# Altium PCB corePCB1nohighfreq.PcbDoc (part 1 of 3)
Units mil, origin at the board's own origin, x right, y up, seen from the top; angles counter-clockwise.
Board outline 3543.31 x 3543.31 mil, 4 copper layers (Top Layer, Layer 1, Layer 2, Bottom Layer), stack 23.756 mil thick; 90 components, 166 nets, 640 pads, 463 vias.
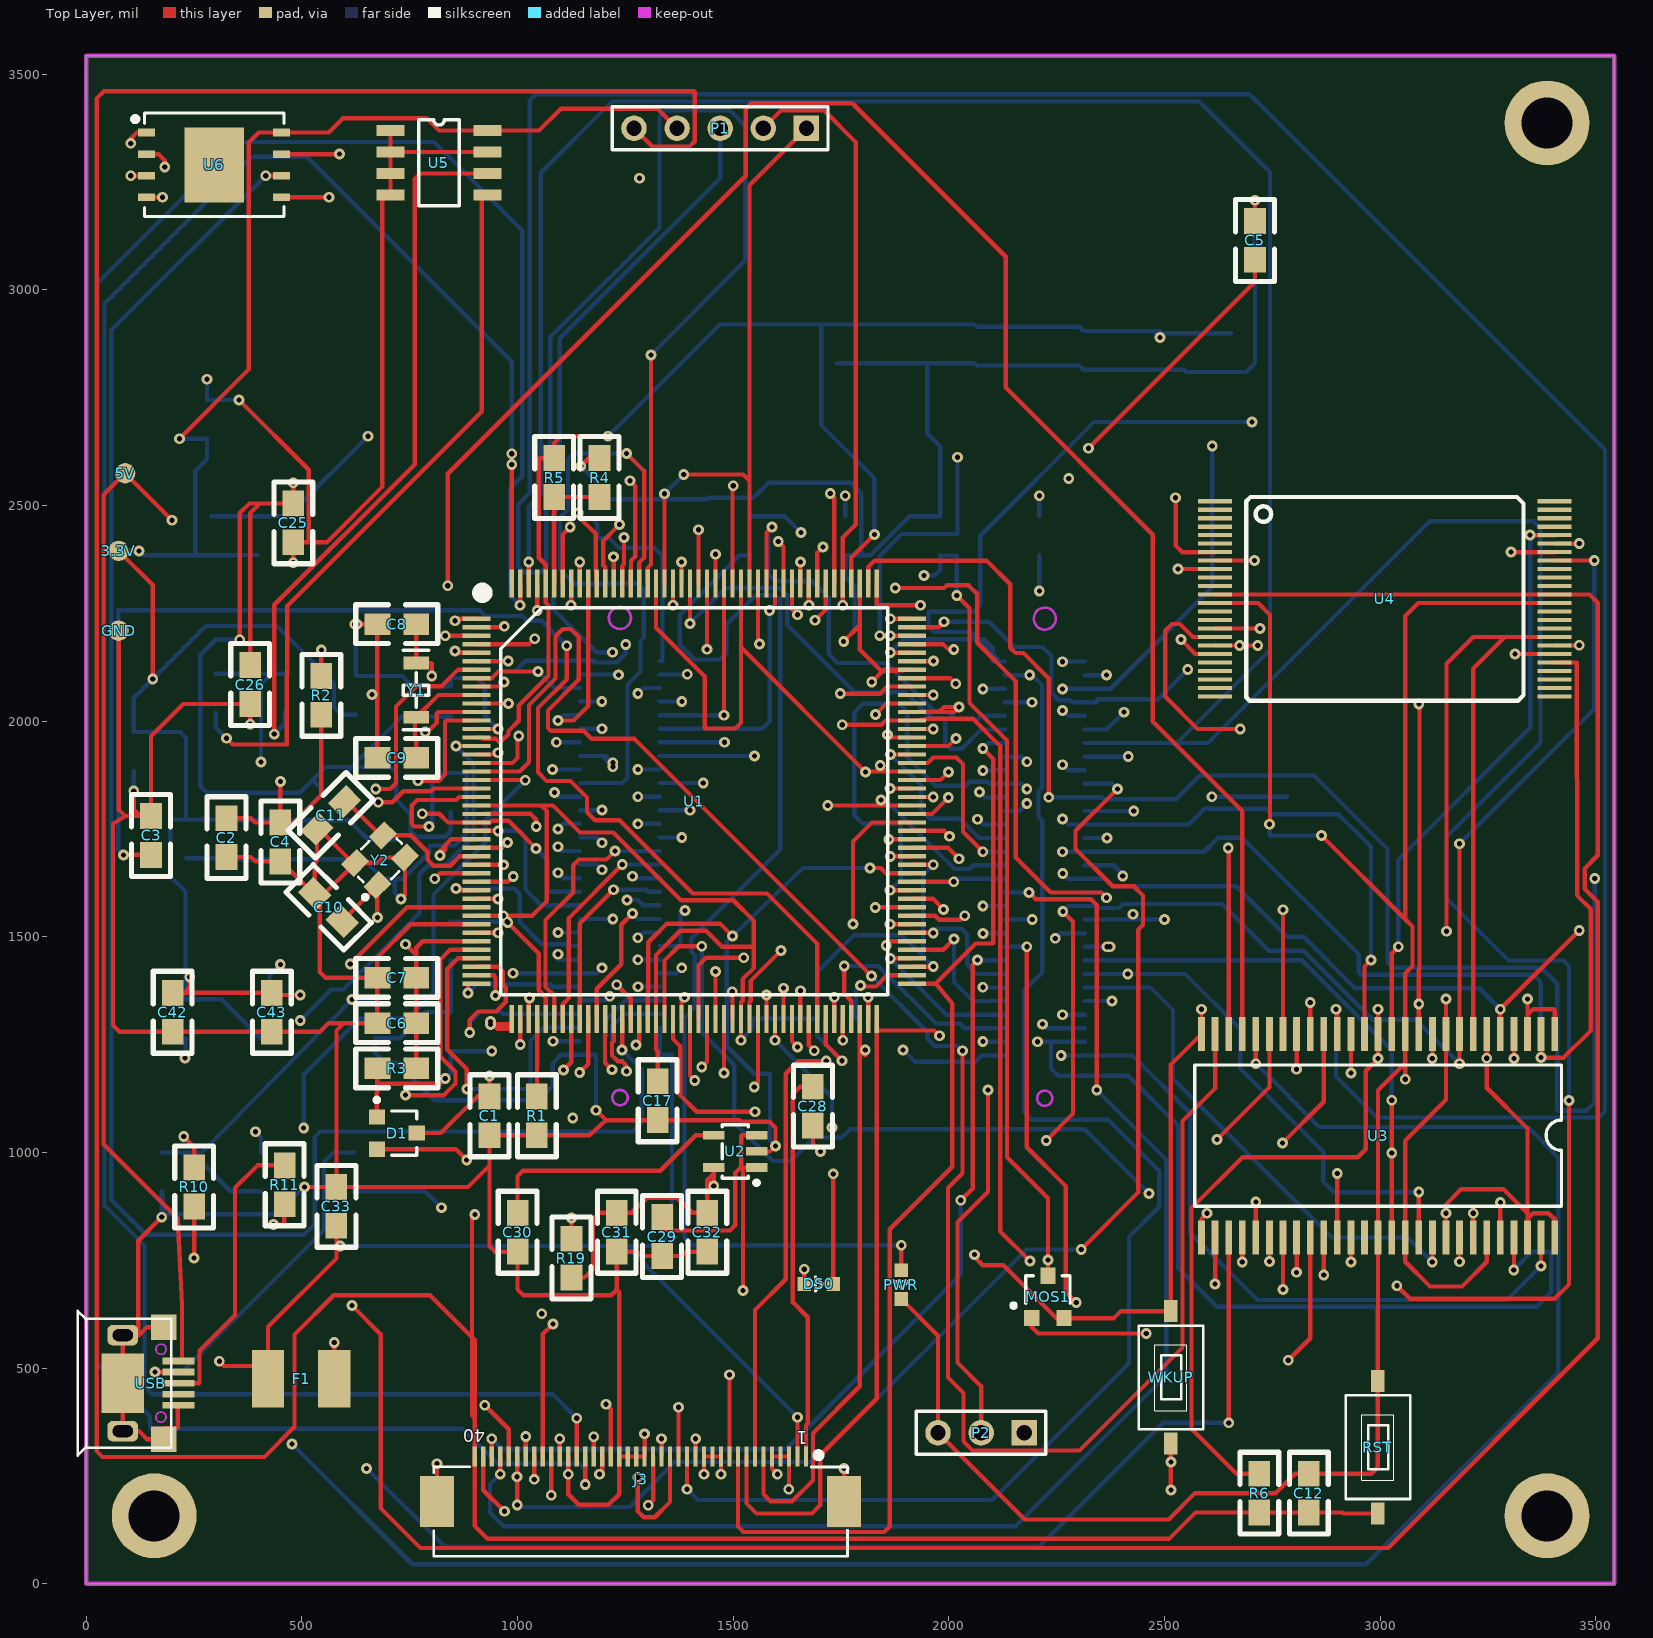
[diagram p0: Top Layer view]
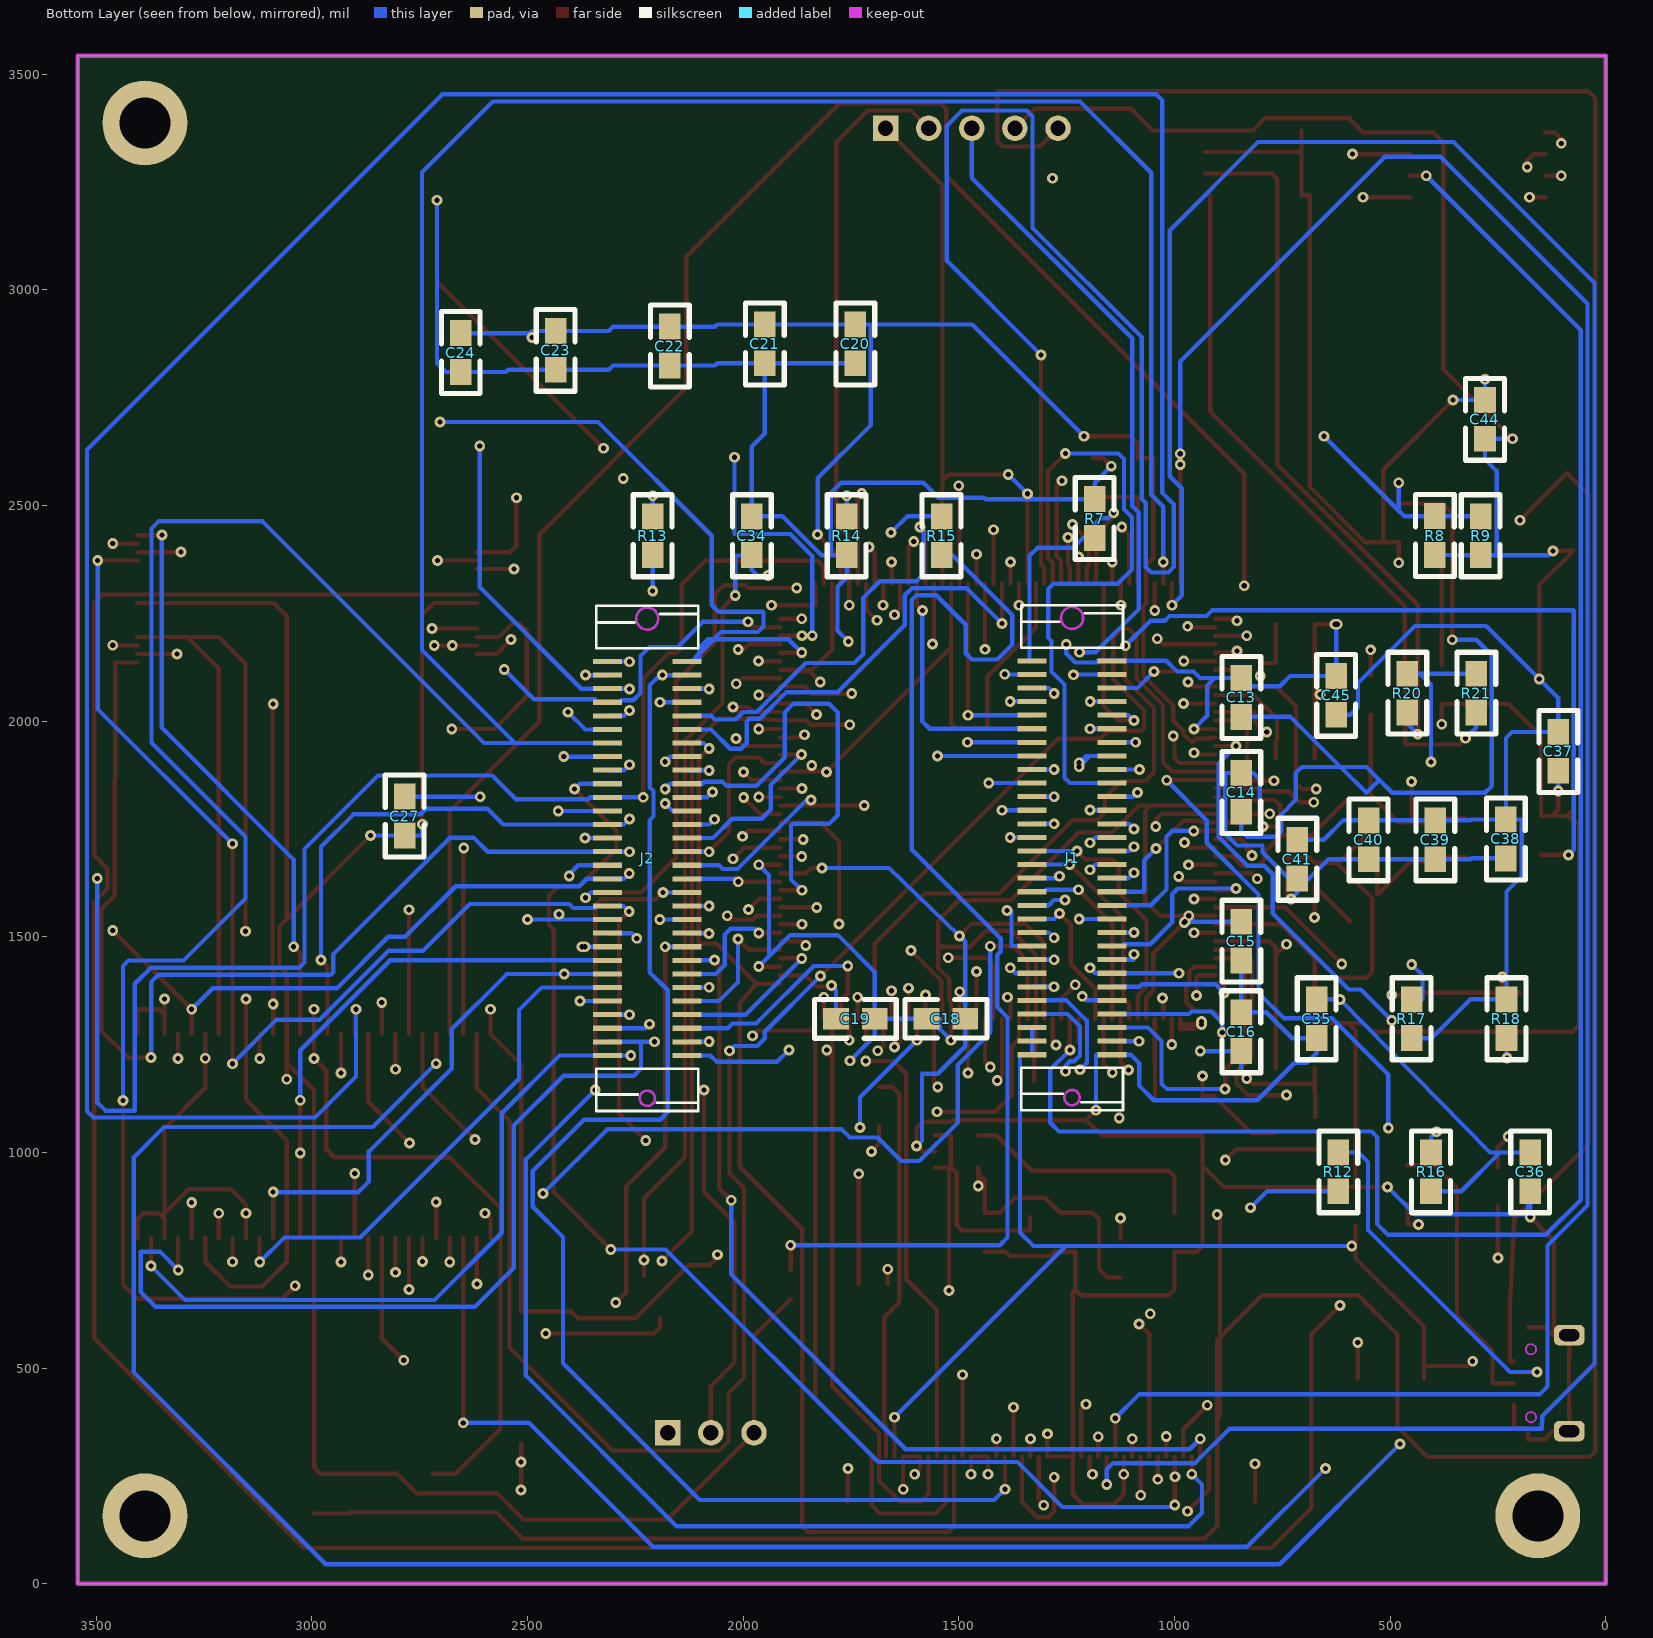
[diagram p1: Bottom Layer view, seen from below]
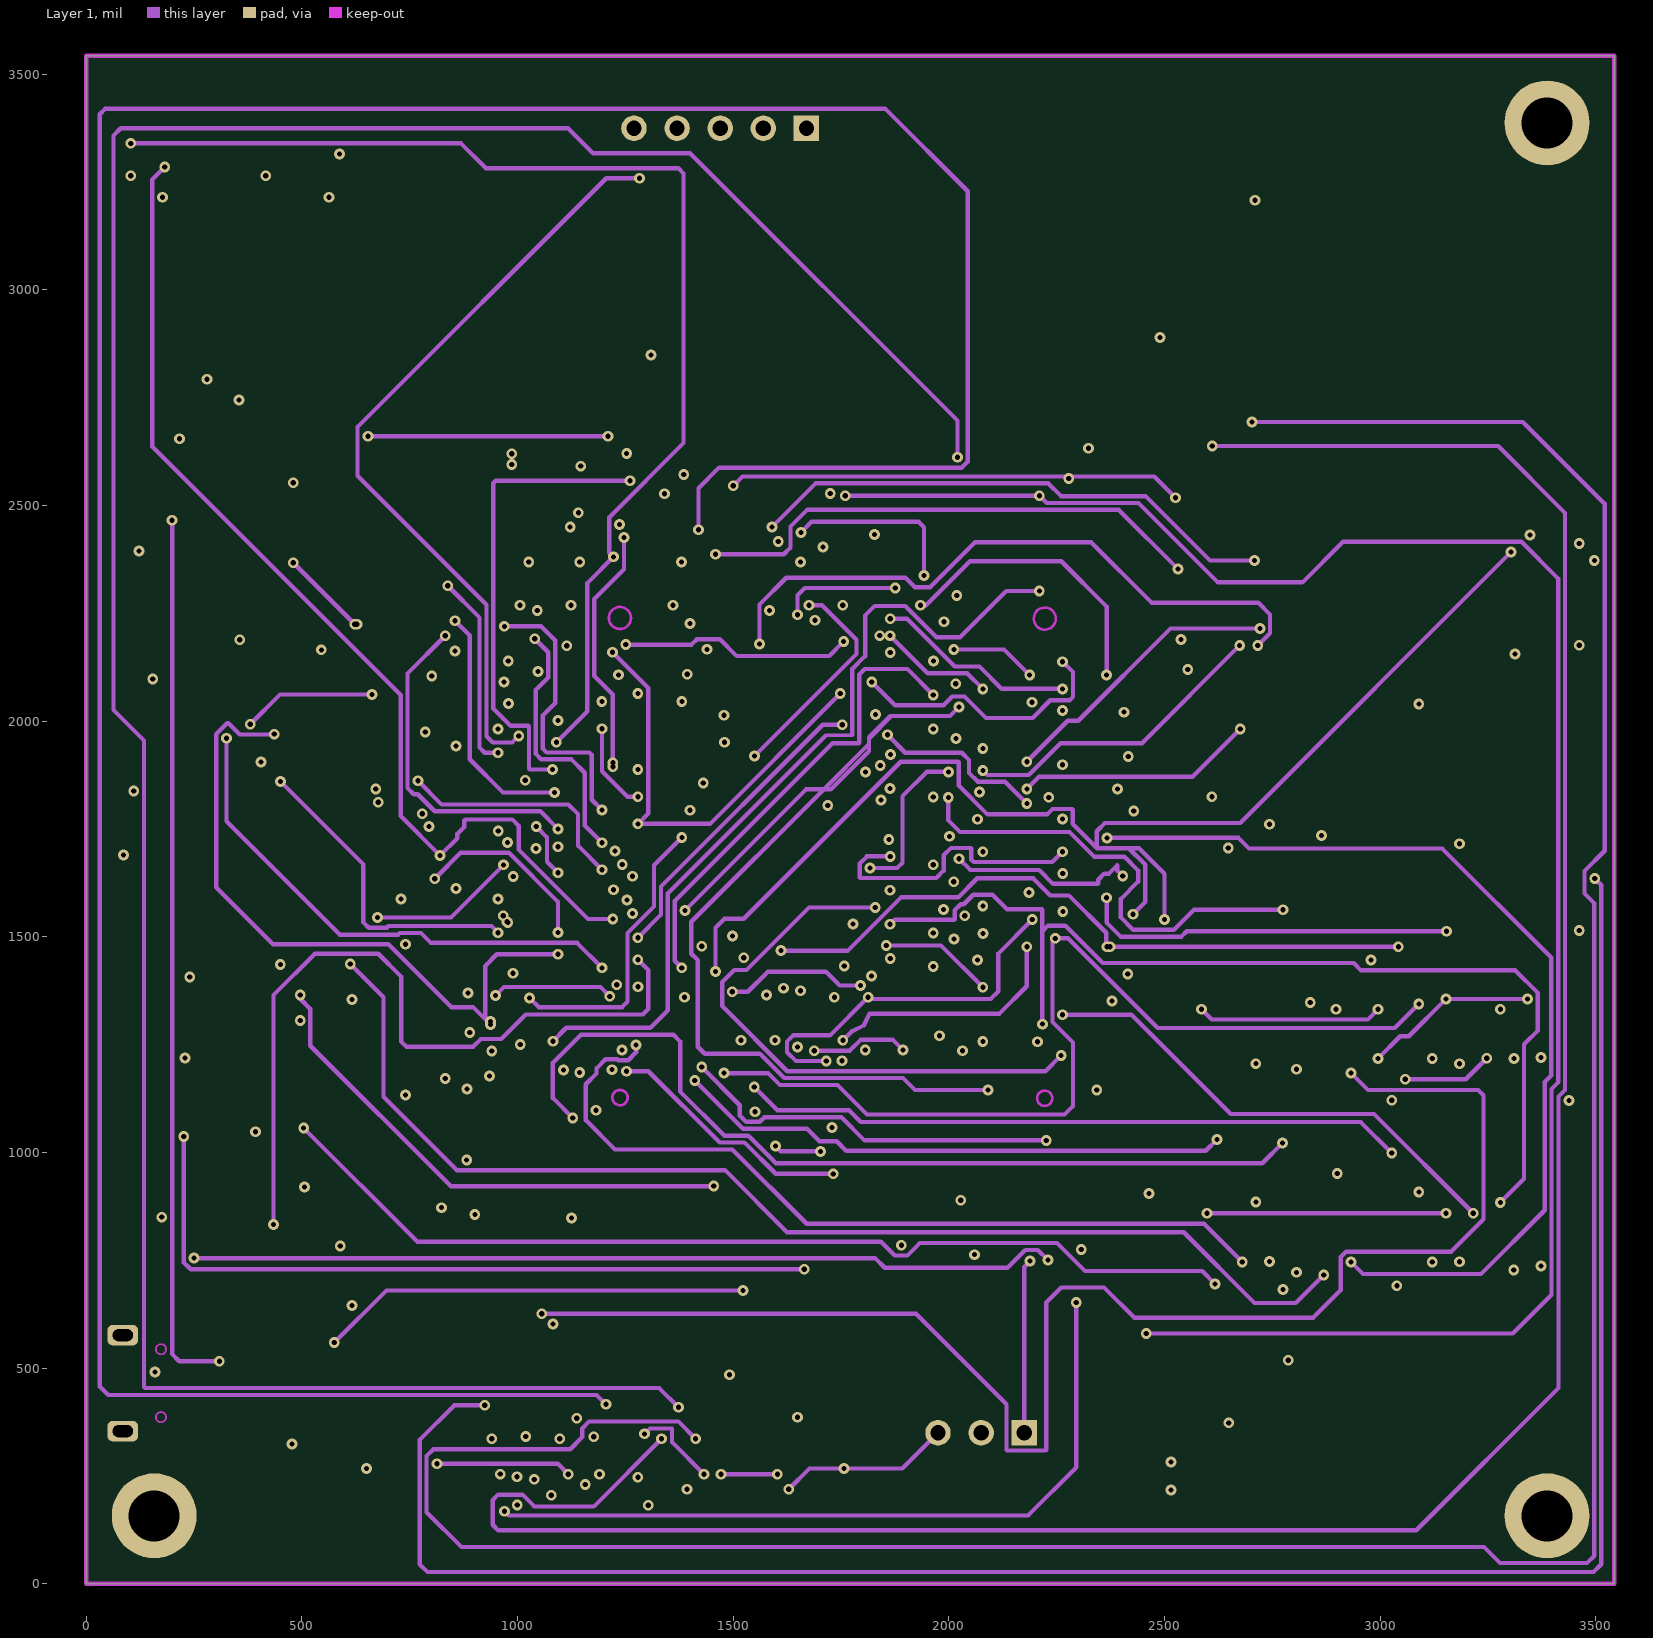
[diagram p2: Layer 1]
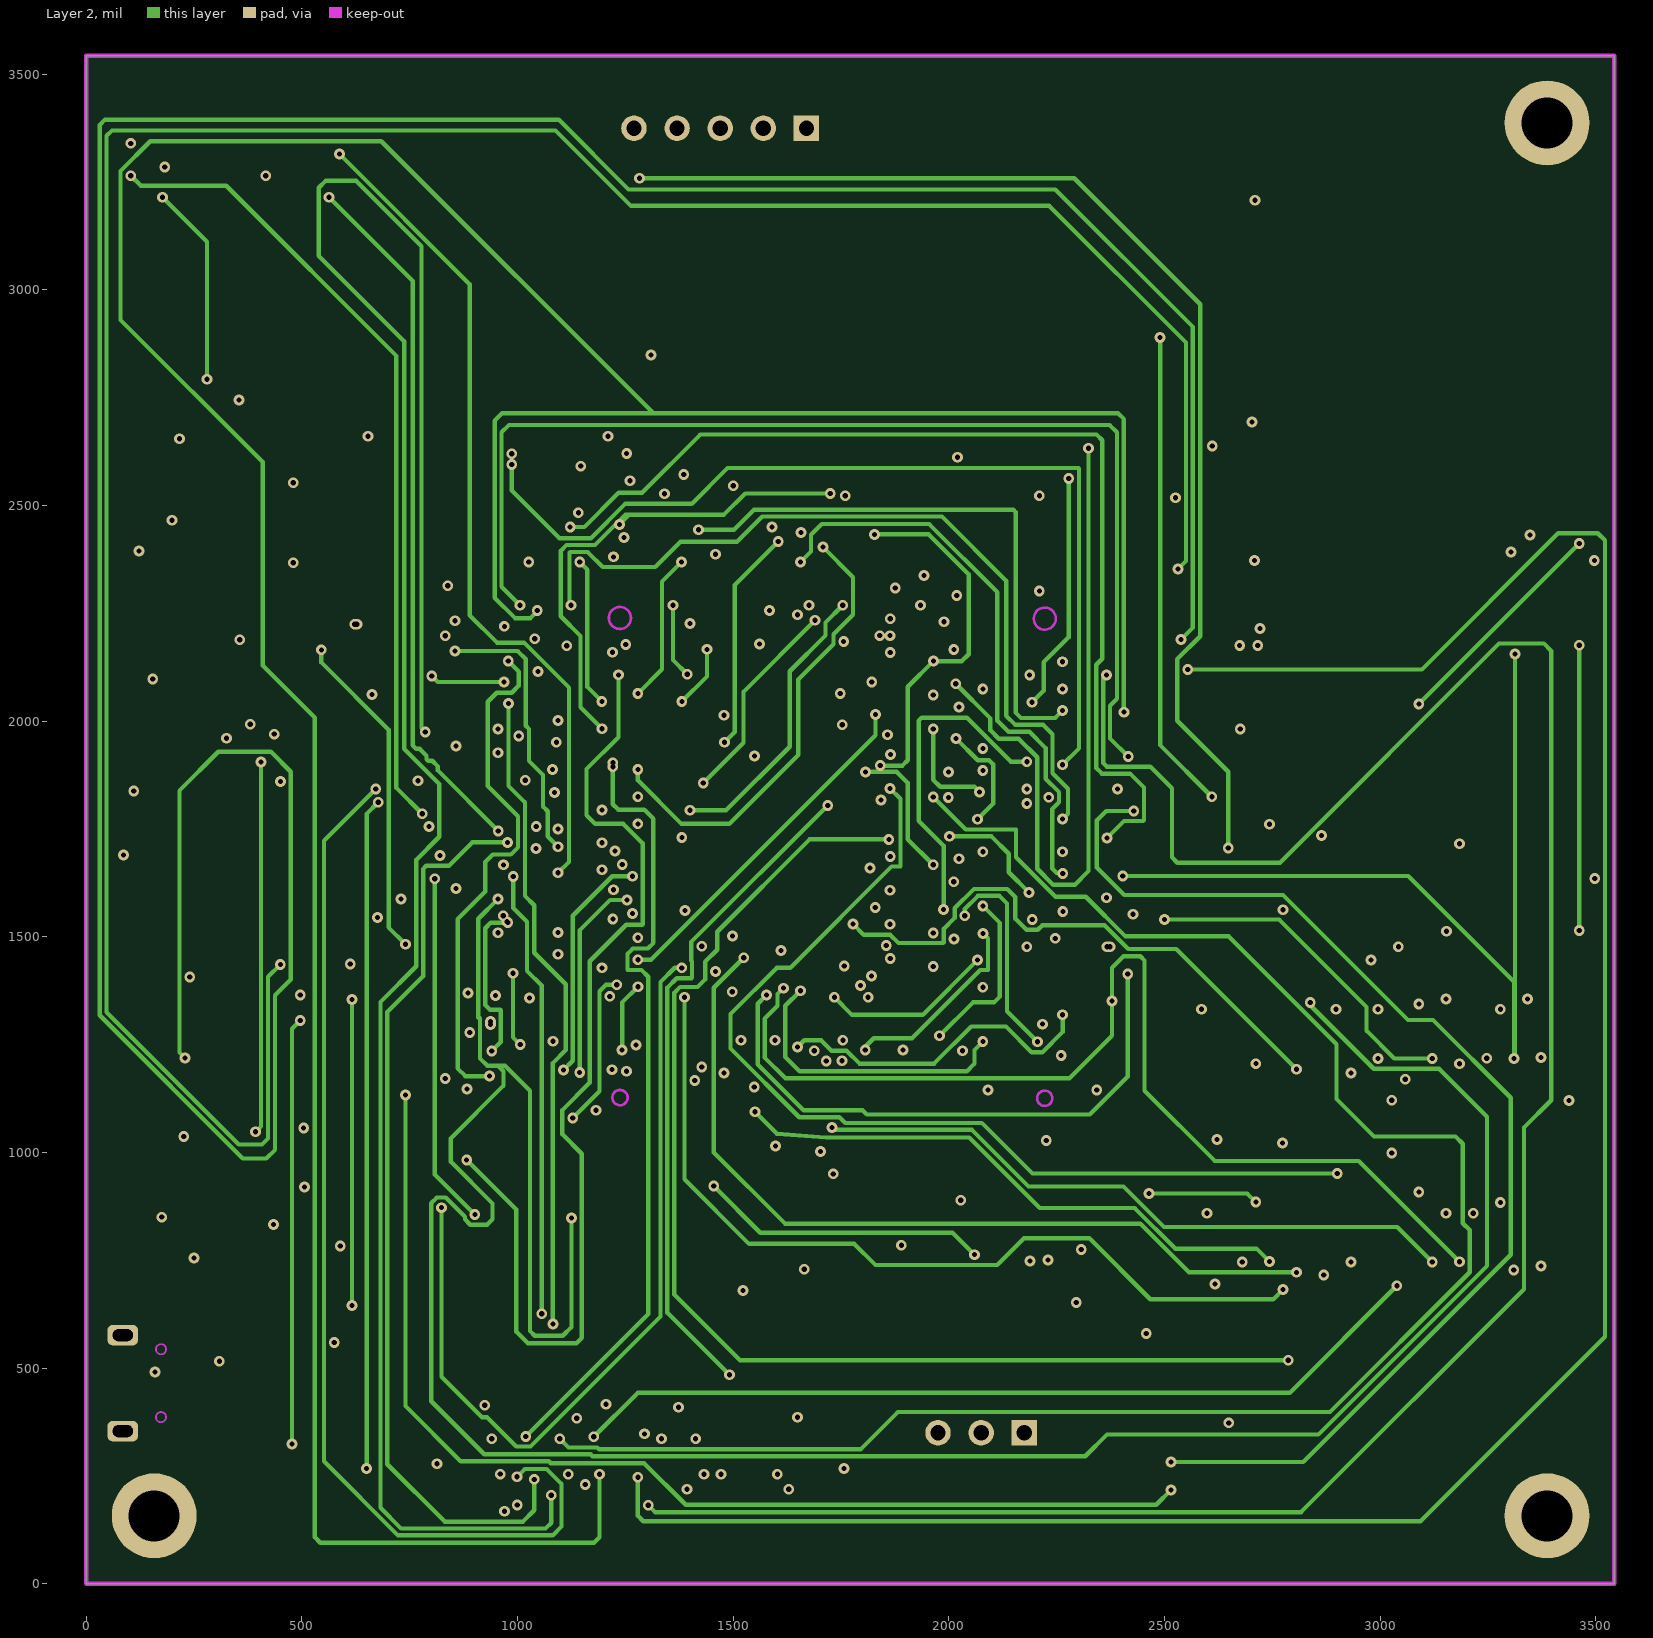
[diagram p3: Layer 2]

## Layer stack, top to bottom
Top Solder: solder mask 0.4, Solder Resist, Dk 3.5
Top Layer: signal copper 1.4
Dielectric1: prepreg 2.8, PP-006, Dk 4.1
Layer 1: signal copper 1.3779
Dielectric2: dielectric 12.6, FR-4, Dk 4.8
Layer 2: signal copper 1.3779
Dielectric3: prepreg 2.8, PP-006, Dk 4.1
Bottom Layer: signal copper 1.4
Bottom Solder: solder mask 0.4, Solder Resist, Dk 3.5

## Board outline
0,0 0,3543.31 3543.31,3543.31 3543.31,0

## Design rules (kind name [scope] priority, off if disabled: settings)
Clearance Clearance_GND [(InPolygon)] p1: gap=20 ignorepadtopadclearanceinfootprint=FALSE except(0: Arc-Hole Track-Hole SMDPad-Hole THPad-Hole Via-Hole Fill-Hole Poly-Hole Region-Hole Text-Hole)
Clearance [All] p2: gap=6 ignorepadtopadclearanceinfootprint=FALSE except(0: Arc-Hole Track-Hole SMDPad-Hole THPad-Hole Via-Hole Fill-Hole Poly-Hole Region-Hole Text-Hole)
ComponentClearance [All] p1: gap=0 collisioncheckmode=3 verticalgap=0 showdistances=FALSE
HoleSize [All] p1: absolutevalues=TRUE maxlimit=1000 minlimit=1 maxpercent=80.000 minpercent=20.000
HoleSize Testpoint [All] p2: absolutevalues=TRUE maxlimit=100 minlimit=1 maxpercent=80.000 minpercent=20.000
HoleSize TestPointUsage [All] p3: absolutevalues=TRUE maxlimit=100 minlimit=1 maxpercent=80.000 minpercent=20.000
MinimumSolderMaskSliver [All] p1: minsoldermaskwidth=0
PlaneConnect [All] p1: planeconnectstyle=Direct reliefexpansion=20 reliefentries=4 reliefconductorwidth=10 reliefairgap=10
PolygonConnect [All] p1: connectstyle=Direct reliefconductorwidth=10 reliefentries=4 polygonreliefangle="90 Angle" airgapwidth=10
RoutingVias [All] p1: holewidth=12 width=25 viastyle="Through Hole" minholewidth=8 minwidth=15 maxholewidth=50 maxwidth=50
SilkToSilkClearance [All] p1: silktosilkclearance=0
SilkToSolderMaskClearance SilkscreenOverComponentPads [IsPad] p1: minsilkscreentomaskgap=0 clearancetoexposedcopper=TRUE
SolderMaskExpansion [All] p1: expansion=4
Width [All] p1: maxlimit=100 minlimit=6 preferedwidth=10
24 further rules are at their usual default settings.

## Classes and differential pairs
component class circuit: 3.3V 5V C28 C29 C30 C31 C32 C33 C34 DS0 F1 GND J3 MOS1 P2 PWR R10 R11 R12 R13 R14 R15 U2 USB WKUP
component class mem: C35 C36 C37 C38 C39 C40 C41 C42 C43 C44 C45 R16 R17 R18 R19 R20 R21 U3 U4 U5 U6
component class stm: C1 C2 C3 C4 C5 C6 C7 C8 C9 C10 C11 C12 C13 C14 C15 C16 C17 C18 C19 C20 C21 C22 C23 C24 C25 C26 C27 D1 J1 J2 P1 R1 R2 R3 R4 R5 R6 R7 R8 R9 RST U1 Y1 Y2

## Components (designator, comment, footprint, x,y, rotation, side; value= is the part's Value field where it differs from the comment)
3.3V "TEST POINT" TP-1.5 75,2395 r90 top
5V "TEST POINT" TP-1.5 90,2575 r0 top
C1 "104" 0805 935,1130 r270 top
C2 "104" 0805 325,1685 r90 top
C3 "225" 0805 150,1690 r90 top
C4 "225" 0805 450,1675 r90 top
C5 "225" 0805 2710,3070 r90 top
C6 "10uF" 0805 675,1300 r0 top
C7 "104" 0805 675,1405 r0 top
C8 "6pF" 0805 675,2225 r0 top
C9 "6pF" 0805 675,1915 r0 top
C10 "22pF" 0805 530,1600 r315 top
C11 "22pF" 0805 535,1750 r45 top
C12 "104" 0805 2835,165 r90 top
C13 "104" 0805 845,2100 r270 bottom
C14 "104" 0805 845,1880 r270 bottom
C15 "104" 0805 845,1445 r90 bottom
C16 "104" 0805 845,1325 r270 bottom
C17 "104" 0805 1325,1075 r90 top
C18 "104" 0805 1485,1310 r0 bottom
C19 "104" 0805 1785,1310 r180 bottom
C20 "104" 0805 1740.06,2830 r90 bottom
C21 "104" 0805 1950,2830 r90 bottom
C22 "104" 0805 2170.06,2825 r90 bottom
C23 "104" 0805 2435,2815 r90 bottom
C24 "104" 0805 2655.06,2810 r90 bottom
C25 "104" 0805 479.94,2415 r90 top
C26 "104" 0805 380,2040 r90 top
C27 "104" 0805 2785.06,1735 r90 bottom
C28 "104" 0805 1684.94,1062.4 r90 top
C29 "10uF" 0805 1335,760 r90 top
C30 "103" 0805 1000,770 r90 top
C31 "104" 0805 1230,770 r90 top
C32 "10uF" 0805 1440,770 r90 top
C33 "104" 0805 580,830 r90 top
C34 "104" 0805 1980.13,2385 r90 bottom
C35 "104" 0805 670.13,1265 r90 bottom
C36 "104" 0805 175.13,910 r90 bottom
C37 "104" 0805 110.06,1885 r90 bottom
C38 "104" 0805 231.45,1681.93 r90 bottom
C39 "104" 0805 395,1680 r90 bottom
C40 "104" 0805 550,1680 r90 bottom
C41 "104" 0805 715,1635 r90 bottom
C42 "104" 0805 200,1280 r90 top
C43 "104" 0805 430,1280 r90 top
C44 "104" 0805 280,2655 r90 bottom
C45 "104" 0805 625,2015 r90 bottom
D1 "BAT54C" SOT-23 715,1045 r270 top
DS0 "LED" SMDLED-0603 1665,695 r0 top
F1 "1812L075PR" *1812 498.23,475 r0 top
GND "TEST POINT" TP-1.5 75,2210 r90 top
J1 "3710M060046G3FT01" 3710F060046G3FT01 1330,1226.61 r0 bottom
J2 "3710M060046G3FT01" 3710F060046G3FT01 2315.04,1225.04 r0 bottom
J3 "RGBLCD" FPC-TOP40 1668.7,299 r180 top
MOS1 "SI2301" SO-G3/C2.5 2230,665 r0 top
P1 "SWD" HDR1X5 1670,3375 r180 top
P2 "USART1" HDR1X3 2175,350 r180 top
PWR "LED" SMDLED-0603 1890,726.93 r270 top
R1 "10K" 0805 1045,1130 r270 top
R2 "10R" 0805 545,2015 r90 top
R3 "10R" 0805 765,1195 r180 top
R4 "0R" 0805 1190,2520 r90 top
R5 "0R" 0805 1085,2520 r90 top
R6 "10K" 0805 2720,165 r90 top
R7 "100K" 0805 1185,2425 r90 bottom
R8 "0R" 0805 396.13,2385.59 r90 bottom
R9 "0R" 0805 290,2385 r90 bottom
R10 "1K" 0805 249.94,875 r90 top
R11 "10R" 0805 460,880 r90 top
R12 "10R" 0805 620.06,910 r90 bottom
R13 "10R" 0805 2210.13,2385 r90 bottom
R14 "100K" 0805 1760.13,2385 r90 bottom
R15 "1K" 0805 1540.13,2385 r90 bottom
R16 "0R" 0805 405.13,910 r90 bottom
R17 "10K" 0805 450.13,1265 r90 bottom
R18 "10K" 0805 230.13,1265 r90 bottom
R19 "10K" 0805 1125,710 r90 top
R20 "4.7K" 0805 460,2020 r90 bottom
R21 "4.7K" 0805 300.13,2020 r90 bottom
RST "KEY_M" KEY_SOP3625 2995,162.91 r90 top
U1 "STM32F767IGT6" LQFP176 905.3,2237.78 r0 top locked
U2 "CAT6219-330TD" SOT-23-5 1555,965 r180 top
U3 "W9825G6KH" TSOP54 3404.96,1275 r270 top
U4 "MT29F4G08" TSOP48 2617.6,2510.27 r0 top
U5 "24C02" SOP-8 705.59,3370 r0 top
U6 "W25Q256" WSON8 296.5,3290 r0 top
USB "USB-AB" "USB_AB - 5S - B" 0,465 r90 top
WKUP "KEY_UP" KEY_SOP3625 2515,325 r90 top
Y1 "32.768KHz" XTAL3215 765,2135 r270 top
Y2 "25Mhz" XTAL3225 675,1620 r45 top

## Footprints (in the part's own frame and the unit in brackets; to place one, negate y for a bottom-side part, rotate by r counter-clockwise, add the part's x,y. Pads: shape width x height; smd on the part's side, far side on the other; paste and mask are expansions set on the pad)
0805 [mil]
  rect 60x50 smd: 1(0,-0.06) 2(90,-0.06)
  silkscreen extent -50,-45 140,45
3710F060046G3FT01 [mm]
  rect 1.7x0.3 smd: 1(-4.7,0) 2(-4.7,-0.8) 3(-4.7,-1.6) 4(-4.7,-2.4) 5(-4.7,-3.2) 6(-4.7,-4) 7(-4.7,-4.8) 8(-4.7,-5.6) 9(-4.7,-6.4) 10(-4.7,-7.2) 11(-4.7,-8) 12(-4.7,-8.8) 13(-4.7,-9.6) 14(-4.7,-10.4) 15(-4.7,-11.2) 16(-4.7,-12) 17(-4.7,-12.8) 18(-4.7,-13.6) 19(-4.7,-14.4) 20(-4.7,-15.2) 21(-4.7,-16) 22(-4.7,-16.8) 23(-4.7,-17.6) 24(-4.7,-18.4) 25(-4.7,-19.2) 26(-4.7,-20) 27(-4.7,-20.8) 28(-4.7,-21.6) 29(-4.7,-22.4) 30(-4.7,-23.2) 31(0,-23.2) 32(0,-22.4) 33(0,-21.6) 34(0,-20.8) 35(0,-20) 36(0,-19.2) 37(0,-18.4) 38(0,-17.6) 39(0,-16.8) 40(0,-16) 41(0,-15.2) 42(0,-14.4) 43(0,-13.6) 44(0,-12.8) 45(0,-12) 46(0,-11.2) 47(0,-10.4) 48(0,-9.6) 49(0,-8.8) 50(0,-8) 51(0,-7.2) 52(0,-6.4) 53(0,-5.6) 54(0,-4.8) 55(0,-4) 56(0,-3.2) 57(0,-2.4) 58(0,-1.6) 59(0,-0.8) 60(0,0)
  Keep-Out Layer circle w0.152: c-2.35,-25.725 r0.65
  Keep-Out Layer circle w0.152: c-2.35,2.525 r0.45
  silkscreen extent -5.35,-26.48 0.65,3.27
*1812 [mm]
  rect 1.9x3.4 smd: 1(-1.95,0) 2(1.95,0)
FPC-TOP40 [mm]
  rect 0.25x1.2 smd: 1(0,0.102) 2(0.5,0.102) 3(1,0.102) 4(1.5,0.102) 5(2,0.102) 6(2.5,0.102) 7(3,0.102) 8(3.5,0.102) 9(4,0.102) 10(4.5,0.102) 11(5,0.102) 12(5.5,0.102) 13(6,0.102) 14(6.5,0.102) 15(7,0.102) 16(7.5,0.102) 17(8,0.102) 18(8.5,0.102) 19(9,0.102) 20(9.5,0.102) 21(10,0.102) 22(10.5,0.102) 23(11,0.102) 24(11.5,0.102) 25(12,0.102) 26(12.5,0.102) 27(13,0.102) 28(13.5,0.102) 29(14,0.102) 30(14.5,0.102) 31(15,0.102) 32(15.5,0.102) 33(16,0.102) 34(16.5,0.102) 35(17,0.102) 36(17.5,0.102) 37(18,0.102) 38(18.5,0.102) 39(19,0.102) 40(19.5,0.102)
  rect 2x3 smd: A(-2.25,2.754) B(21.725,2.754)
  silkscreen extent -2.45,-0.15 21.92,5.97
HDR1X3 [mm]
  rect 1.5x1.5 hole 0.9: 1(0,0)
  round 1.5 hole 0.9: 2(2.54,0) 3(5.08,0)
  silkscreen extent -1.27,-1.27 6.35,1.27
HDR1X5 [mm]
  rect 1.5x1.5 hole 0.9: 1(0,0)
  round 1.5 hole 0.9: 2(2.54,0) 3(5.08,0) 4(7.62,0) 5(10.16,0)
  silkscreen extent -1.27,-1.27 11.43,1.27
KEY_SOP3625 [mm]
  rect 1.3x0.8 smd: 1(0,0) 2(7.8,0)
  silkscreen extent 0.85,-1.9 6.95,1.9
LQFP176 [mm]
  rect 1.65x0.254 smd: 1(0,0) 2(0,-0.5) 3(0,-1) 4(0,-1.5) 5(0,-2) 6(0,-2.5) 7(0,-3) 8(0,-3.5) 9(0,-4) 10(0,-4.5) 11(0,-5) 12(0,-5.5) 13(0,-6) 14(0,-6.5) 15(0,-7) 16(0,-7.5) 17(0,-8) 18(0,-8.5) 19(0,-9) 20(0,-9.5) 21(0,-10) 22(0,-10.5) 23(0,-11) 24(0,-11.5) 25(0,-12) 26(0,-12.5) 27(0,-13) 28(0,-13.5) 29(0,-14) 30(0,-14.5) 31(0,-15) 32(0,-15.5) 33(0,-16) 34(0,-16.5) 35(0,-17) 36(0,-17.5) 37(0,-18) 38(0,-18.5) 39(0,-19) 40(0,-19.5) 41(0,-20) 42(0,-20.5) 43(0,-21) 44(0,-21.5) 89(25.631,-21.5) 90(25.631,-21) 91(25.631,-20.5) 92(25.631,-20) 93(25.631,-19.5) 94(25.631,-19) 95(25.631,-18.5) 96(25.631,-18) 97(25.631,-17.5) 98(25.631,-17) 99(25.631,-16.5) 100(25.631,-16) 101(25.631,-15.5) 102(25.631,-15) 103(25.631,-14.5) 104(25.631,-14) 105(25.631,-13.5) 106(25.631,-13) 107(25.631,-12.5) 108(25.631,-12) 109(25.631,-11.5) 110(25.631,-11) 111(25.631,-10.5) 112(25.631,-10) 113(25.631,-9.5) 114(25.631,-9) 115(25.631,-8.5) 116(25.631,-8) 117(25.631,-7.5) 118(25.631,-7) 119(25.631,-6.5) 120(25.631,-6) 121(25.631,-5.5) 122(25.631,-5) 123(25.631,-4.5) 124(25.631,-4) 125(25.631,-3.5) 126(25.631,-3) 127(25.631,-2.5) 128(25.631,-2) 129(25.631,-1.5) 130(25.631,-1) 131(25.631,-0.5) 132(25.631,0)
  rect 0.254x1.65 smd: 45(2.065,-23.566) 46(2.566,-23.566) 47(3.066,-23.566) 48(3.565,-23.566) 49(4.066,-23.566) 50(4.565,-23.566) 51(5.066,-23.566) 52(5.565,-23.566) 53(6.066,-23.566) 54(6.565,-23.566) 55(7.066,-23.566) 56(7.565,-23.566) 57(8.066,-23.566) 58(8.565,-23.566) 59(9.066,-23.566) 60(9.565,-23.566) 61(10.066,-23.566) 62(10.565,-23.566) 63(11.066,-23.566) 64(11.565,-23.566) 65(12.066,-23.566) 66(12.565,-23.566) 67(13.066,-23.566) 68(13.565,-23.566) 69(14.066,-23.566) 70(14.565,-23.566) 71(15.066,-23.566) 72(15.566,-23.566) 73(16.066,-23.566) 74(16.566,-23.566) 75(17.065,-23.566) 76(17.566,-23.566) 77(18.065,-23.566) 78(18.566,-23.566) 79(19.065,-23.566) 80(19.566,-23.566) 81(20.065,-23.566) 82(20.566,-23.566) 83(21.065,-23.566) 84(21.566,-23.566) 85(22.065,-23.566) 86(22.566,-23.566) 87(23.065,-23.566) 88(23.566,-23.566) 133(23.566,2.065) 134(23.065,2.065) 135(22.566,2.065) 136(22.065,2.065) 137(21.566,2.065) 138(21.065,2.065) 139(20.566,2.065) 140(20.065,2.065) 141(19.566,2.065) 142(19.065,2.065) 143(18.566,2.065) 144(18.065,2.065) 145(17.566,2.065) 146(17.065,2.065) 147(16.566,2.065) 148(16.066,2.065) 149(15.566,2.065) 150(15.066,2.065) 151(14.565,2.065) 152(14.066,2.065) 153(13.565,2.065) 154(13.066,2.065) 155(12.565,2.065) 156(12.066,2.065) 157(11.565,2.065) 158(11.066,2.065) 159(10.565,2.065) 160(10.066,2.065) 161(9.565,2.065) 162(9.066,2.065) 163(8.565,2.065) 164(8.066,2.065) 165(7.565,2.065) 166(7.066,2.065) 167(6.565,2.065) 168(6.066,2.065) 169(5.565,2.065) 170(5.066,2.065) 171(4.565,2.065) 172(4.066,2.065) 173(3.565,2.065) 174(3.066,2.065) 175(2.566,2.065) 176(2.065,2.065)
  silkscreen extent 0.04,-22.15 24.22,1.82
SMDLED-0603 [mil]
  rect 32x32 smd: 1(0,0) 2(66.93,0)
  silkscreen extent 26,-17 42,17
SO-G3/C2.5 [mm]
  rect 0.9x0.95 smd: 1(-0.95,-1.25) 2(0.95,-1.25) 3(0,1.25)
  silkscreen extent -2.15,-0.63 1.3,1.25
SOP-8 [mil]
  rect 65x25 smd: 1(0,0) 2(0,-50) 3(0,-100) 4(0,-150) 5(224.41,-150) 6(224.41,-100) 7(224.41,-50) 8(224.41,0)
  silkscreen extent 65,-175 159,25
SOT-23 [mm]
  rect 0.9x0.95 smd: 1(-0.95,-1.048) 2(0.95,-1.048) 3(0,1.302)
  silkscreen extent -2.07,-1.17 1.3,1.3
SOT-23-5 [mil]
  rect 50x20 smd: 1(0,0) 2(0,-37.4) 3(0,-74.8) 4(100,-74.8) 5(100,0)
  silkscreen extent 0,-99 80,35
TP-1.5 [mm]
  round 1.2 smd: 1(0,0)
TSOP48 [mm]
  rect 2x0.25 smd: 1(0,0) 2(0,-0.5) 3(0,-1) 4(0,-1.5) 5(0,-2) 6(0,-2.5) 7(0,-3) 8(0,-3.5) 9(0,-4) 10(0,-4.5) 11(0,-5) 12(0,-5.5) 13(0,-6) 14(0,-6.5) 15(0,-7) 16(0,-7.5) 17(0,-8) 18(0,-8.5) 19(0,-9) 20(0,-9.5) 21(0,-10) 22(0,-10.5) 23(0,-11) 24(0,-11.5) 25(20,-11.5) 26(20,-11) 27(20,-10.5) 28(20,-10) 29(20,-9.5) 30(20,-9) 31(20,-8.5) 32(20,-8) 33(20,-7.5) 34(20,-7) 35(20,-6.5) 36(20,-6) 37(20,-5.5) 38(20,-5) 39(20,-4.5) 40(20,-4) 41(20,-3.5) 42(20,-3) 43(20,-2.5) 44(20,-2) 45(20,-1.5) 46(20,-1) 47(20,-0.5) 48(20,0)
  silkscreen extent 1.83,-11.75 18.17,0.25
TSOP54 [mm]
  rect 2x0.4 smd: 1(0,0) 2(0,-0.8) 3(0,-1.6) 4(0,-2.4) 5(0,-3.2) 6(0,-4) 7(0,-4.8) 8(0,-5.6) 9(0,-6.4) 10(0,-7.2) 11(0,-8) 12(0,-8.8) 13(0,-9.6) 14(0,-10.4) 15(0,-11.2) 16(0,-12) 17(0,-12.8) 18(0,-13.6) 19(0,-14.4) 20(0,-15.2) 21(0,-16) 22(0,-16.8) 23(0,-17.6) 24(0,-18.4) 25(0,-19.2) 26(0,-20) 27(0,-20.8) 28(12,-20.8) 29(12,-20) 30(12,-19.2) 31(12,-18.4) 32(12,-17.6) 33(12,-16.8) 34(12,-16) 35(12,-15.2) 36(12,-14.4) 37(12,-13.6) 38(12,-12.8) 39(12,-12) 40(12,-11.2) 41(12,-10.4) 42(12,-9.6) 43(12,-8.8) 44(12,-8) 45(12,-7.2) 46(12,-6.4) 47(12,-5.6) 48(12,-4.8) 49(12,-4) 50(12,-3.2) 51(12,-2.4) 52(12,-1.6) 53(12,-0.8) 54(12,0)
  silkscreen extent 1.83,-21.2 10.16,0.4
"USB_AB - 5S - B" [mm]
  rect 0.4x1.9 smd: 1(1.3,-5.436) 2(0.65,-5.436) 3(0,-5.436) 4(-0.65,-5.436) 5(-1.3,-5.436)
  rrect50% 1.2x1.8 hole 0.7 slot 1.2 at 90 deg: 6(2.825,-2.15) 7(-2.825,-2.15)
  rect 1.5x1.5 smd: 8(-3.302,-4.572) 9(3.302,-4.572)
  rect 3.5x2.5 smd: 9(0,-2.159)
  Keep-Out Layer circle w0.102: c2,-4.4 r0.3
  Keep-Out Layer circle w0.102: c-2,-4.4 r0.3
  silkscreen extent -4.26,-5 4.26,0.51
WSON8 [mm]
  rect 1x0.45 smd: 1(-3.975,1.905) 2(-3.975,0.635) 3(-3.975,-0.635) 4(-3.975,-1.905) 5(3.975,-1.905) 6(3.975,-0.635) 7(3.975,0.635) 8(3.975,1.905)
  rect 3.5x4.4 smd: 9(0,0)
  silkscreen extent -4.8,-3.05 4.1,3.05
XTAL3215 [mm]
  rect 0.75x1.5 smd: 1(0,0) 2(3.2,0)
  silkscreen extent -0.74,-0.75 3.94,0.75
XTAL3225 [mm]
  rect 1.3x1.05 smd: 1(0,0) 2(2.3,0) 3(2.3,1.85) 4(0,1.85)
  silkscreen extent -1.14,-0.33 2.74,2.17

## Part data
3.3V 5V GND: library part TEST-POINT, "测试点"
C1 C2 C3 C4 C5 C6 C7 C8 C9 C10 C11 C12 C13 C14 C15 C16 C17 C18 C19 C20 C21 C22 C23 C24 C25 C26 C27 C28 C29 C30 C31 C32 C33 C34 C35 C36 C37 C38 C39 C40 C41 C42 C43 C44 C45: library part C
D1: "双肖特基二极管"
F1: "PTC Resettable Fuse 0.75A_hold_ 1.5A_trip_ 13.2VDC 100A 0.8W 0.2s 0.1Ohm SMD Solder Pad 1812 T/R"
J1 J2: library part 3710F, "3710F060046G3FT01"
J3: library part FPC-40, "FPC-40P-0.5mm"
MOS1: library part MOS-P, "IRLML6401/SI2301"
P1: library part "Header 5", "Header, 5-Pin"
P2: library part "Header 3", "Header, 3-Pin"
R1 R2 R3 R4 R5 R6 R7 R8 R9 R10 R11 R12 R13 R14 R15 R16 R17 R18 R19 R20 R21: library part R
U2: "3.3V 500mA LDO"
U3: library part IS42S16160B, "32MB SDRAM"
U4: library part K9F2G08U0C, "256MB NAND FLASH"
U5: library part 24C256, "EEPROM"
U6: library part W25Q128, "W25Q128"
USB: "MicroUSB"
WKUP: library part KEY_M
Y1: library part XTAL, "普通晶振"
Y2: library part XTAL_3225, "3225贴片无"

## Free pads (board coordinates)
  round 196.85 hole 118.11: 0(157.48,157.48) 0(3387.52,157.48) 0(3387.52,3387.52)

## Via types
v1: diameter 25, hole 12, Top Layer to Bottom Layer, 463 vias

## Nets (pads, with @x,y where several pads share a name; then routed paths per layer and width w, separated by ;. In a path a pad name is that pad's centre, name@x,y a point inside that pad or via, vN(x,y) a via of type N, cw(c..) or ccw(c..) an arc to the next point about the centre after c; other vN are vias at no path point)
1WIRE_DQ: J2.4 U1.92 | length 369.8
  Top Layer w10: v1(1864.37,1449.63) 1865.12,1450.37 U1.92@1914.39,1450.37
  Bottom Layer w10: v1(1864.37,1449.63) 1994.47,1319.53 J2.4@2130,1319.53
BOOT0: J1.31 R7.1 U1.166 | length 686
  Top Layer w10: v1(1141,2483.5) 1141,2475 1181,2435 1181,2353.47 U1.166@1183.47,2319.09
  Bottom Layer w10: v1(1141,2483.5) 1153.5,2471 1171.44,2471 1184.94,2457.5 R7.1@1184.94,2425 1212,2425 1235,2402 1317.5,2402 1336,2383.5 1336,2140 J1.31@1330,2140
DCMI_D0: J2.16 U1.115 | length 403.4
  Top Layer w10: U1.115@1914.39,1903.13 1951.13,1903.13 1964,1916 2017.5,1916 2033,1900.5 2033,1743.48 v1(2079,1697.48)
  Bottom Layer w10: v1(2079,1697.48) J2.16@2130,1697.48
DCMI_D1: J2.17 U1.116 | length 428
  Top Layer w10: v1(1865,1922.82) U1.116@1914.39,1922.82
  Bottom Layer w10: v1(1865,1922.82) 1936,1851.82 1936,1795 1956.98,1774.02 2025.37,1774.02 2070.42,1728.98 J2.17@2130,1728.98
DCMI_D2: J2.18 U1.117 | length 431.8
  Top Layer w10: U1.117@1914.39,1942.5 1999,1942.5 v1(2016.5,1960)
  Layer 2 w10: v1(2016.5,1960) 2067,1909.5 2093.45,1909.5 2103,1899.95 2103,1809 v1(2066.5,1772.5)
  Bottom Layer w10: v1(2066.5,1772.5) 2078.53,1760.47 J2.18@2130,1760.47
DCMI_D3: J2.19 U1.118 | length 524.2
  Top Layer w10: v1(1857.75,1968.44) 1864,1962.19 U1.118@1914.39,1962.19
  Layer 1 w10: v1(1857.75,1968.44) 1899.19,1926.99 2030,1926.99 2047.04,1909.96 2047.04,1879.93 2067.5,1859.46 2130.54,1859.46 v1(2181,1809)
  Bottom Layer w10: J2.19@2130,1791.97 2163.97,1791.97 v1(2181,1809)
DCMI_D4: J1.39 U1.140 | length 1209.9
  Top Layer w10: U1.140@1695.28,2319.09 1695.28,2391.28 v1(1708,2404)
  Layer 2 w10: v1(1279,1888.03) 1279,1863 1380,1762 1491,1762 1651,1922 1651,2096.68 1732.7,2178.39 1732.7,2201.7 1778,2247 1778,2334 v1(1708,2404)
  Bottom Layer w10: v1(1279,1888.03) J1.39@1330,1888.03
DCMI_D5: J1.36 U1.145 | length 586.2
  Top Layer w10: v1(1584.5,2256.5) 1596.85,2268.85 U1.145@1596.85,2319.09
  Bottom Layer w10: J1.36@1330,1982.52 1567.5,1982.52 1584.5,1999.52 v1(1584.5,2256.5)
DCMI_D6: J1.26 U1.167 | length 423.7
  Top Layer w10: v1(1094,2001.52) 1130,2001.52 1163.78,2035.3 U1.167@1163.78,2319.09
  Bottom Layer w10: v1(1094,2001.52) 1106.5,2014.02 J1.26@1144.96,2014.02
DCMI_D7: J1.27 U1.168 | length 445
  Top Layer w10: U1.168@1144.1,2319.09 v1(1144.1,2369)
  Layer 2 w10: v1(1144.1,2369) 1162,2351.1 1162,2079.51 v1(1195.51,2046)
  Bottom Layer w10: J1.27@1144.96,2045.51 1195.02,2045.51 v1(1195.51,2046)
DCMI_HREF: J2.3 U1.85 | length 561.7
  Top Layer w10: v1(1757.5,1432.5) 1757.5,1368.5 1774.02,1351.98 U1.85@1774.02,1310
  Bottom Layer w10: v1(1757.5,1432.5) 1836.5,1432.5 1970.05,1298.95 2025.08,1298.95 2036,1288.03 J2.3@2130,1288.03
DCMI_PLCK: J1.47 U1.52 | length 735.2
  Top Layer w10: v1(1106.41,1191) 1124.41,1209 U1.52@1124.41,1310
  Layer 2 w10: v1(1106.41,1191) 1128,1212.59 1128,1549.07 1219.5,1640.57 v1(1266.5,1640.57)
  Bottom Layer w10: v1(1266.5,1640.57) 1271,1636.06 J1.47@1330,1636.06
DCMI_RESET: J1.25 J1.41 U1.138 U1.165 | length 1839.9
  Top Layer w10: U1.165@1203.15,2319.09 1203.15,2356.85 1199,2361 1199,2418.5 v1(1236.5,2456) ; v1(1725,2528) 1734.65,2518.35 U1.138@1734.65,2319.09
  Layer 1 w10: v1(1196,1982.52) 1196,1884 1254.96,1825.04 v1(1279,1825.04)
  Layer 2 w10: v1(1196,1982.52) 1146,2032.52 1146,2197.5 1100,2243.5 1100,2395 1113.5,2408.5 1179.78,2408.5 1250.28,2479 1259.5,2479 ; v1(1236.5,2456) 1259.5,2479 ; v1(1725,2528) 1527.94,2528 1478.94,2479 1259.5,2479
  Bottom Layer w10: J1.25@1144.96,1982.52 v1(1196,1982.52) ; v1(1279,1825.04) J1.41@1330,1825.04
DCMI_SCL: J1.22 U1.162 | length 1406.6
  Top Layer w10: v1(1260.7,2557.5) 1272.7,2545.5 1272.7,2381.7 1263,2372 1263,2347.79 1262.21,2347 U1.162@1262.21,2319.09
  Layer 1 w10: v1(1081,1888) 1028.06,1888 1026.5,1889.56 1026.5,1988 1025,1989.5 984,1989.5 943.84,2029.66 943.84,2551.84 949.5,2557.5 v1(1260.7,2557.5)
  Bottom Layer w10: v1(1081,1888) J1.22@1144.96,1888.03
DCMI_SDA: J1.21 U1.161 | length 1510
  Top Layer w10: v1(1253,2621) 1293.5,2580.5 1293.5,2379.16 1281.89,2367.55 U1.161@1281.89,2319.09
  Bottom Layer w10: J1.21@1144.96,1856.54 1242.5,1856.54 1255,1869.04 1255,2085 1285,2115 1285,2186 1293,2194 1293,2306 1280,2319 1131.5,2319 1098.5,2352 1098.5,2473 1117,2491.5 1117,2608 1130,2621 v1(1253,2621)
DCMI_XCLK: J2.20 U1.119 | length 350.5
  Top Layer w10: U1.119@1914.39,1981.87 1963.87,1981.87 v1(1964,1982)
  Layer 2 w10: v1(1964,1982) 1964,1864 1980,1848 2059.5,1848 v1(2071.54,1835.96)
  Bottom Layer w10: v1(2071.54,1835.96) 2084.04,1823.46 J2.20@2130,1823.46
ETH_MDC: J1.9 U1.33 | length 434.1
  Top Layer w10: v1(857,1612) 861.15,1607.85 U1.33@905.3,1607.85
  Bottom Layer w10: v1(857,1612) 992.5,1612 1005,1599.5 1005,1534.23 1056.23,1483 1117.5,1483 1117.5,1478.58 J1.9@1144.96,1478.58
ETH_MDIO: J1.4 U1.42 | length 561.3
  Top Layer w10: v1(889,1278) 889,1307.46 908.54,1327 950.5,1327 972.5,1349 972.5,1382.5 966,1389 966,1419.69 955,1430.69 U1.42@905.3,1430.69
  Bottom Layer w10: v1(889,1278) 889,1301.5 914.5,1327 960.5,1327 966.4,1321.1 J1.4@1144.96,1321.1
FMC_A0: U1.16 U3.23 | length 6492.2
  Top Layer w10: v1(857,1942.5) U1.16@905.3,1942.5 ; v1(2712.05,1205.95) U3.23@2712.05,1275
  Layer 2 w10: v1(477,324) 477,1287 v1(496,1306)
  Bottom Layer w10: v1(477,324) 756,45 2968,45 3413,490 3413,989 3343,1059 2859,1059 v1(2712.05,1205.95) ; v1(496,1306) 568,1378 596,1378 771.92,1553.92 771.92,1644.92 791.97,1664.97 830.97,1664.97 898,1732 898,1901.5 v1(857,1942.5)
FMC_A1: U1.17 U3.24 | length 4682.3
  Top Layer w10: v1(838,2314) 838,2574 1529,3265 1529,3420 1542,3433 1776,3433 2132,3077 2132,2773.5 2473,2432.5 2473,1999 2680.55,1791.45 U3.24@2680.55,1275 ; U1.17@905.3,1922.82 950.82,1922.82 v1(955,1927)
  Layer 1 w10: v1(838,2314) 911.84,2240.16 911.84,1939.16 924,1927 v1(955,1927)
FMC_A2: U1.18 U3.25 | length 5157.7
  Top Layer w10: U1.18@905.3,1903.13 988.23,1903.13 1000,1914.9 1000,1963 v1(1003,1966) ; v1(2648,1706) 2649.05,1704.95 U3.25@2649.05,1275
  Layer 1 w10: v1(1003,1966) 987.5,1950.5 942.5,1950.5 927.84,1965.16 927.84,2270.16 629,2569 629,2682.5 1205.5,3259 v1(1283,3259)
  Layer 2 w10: v1(1283,3259) 2291,3259 2583,2967 2583,2197 2530,2144 2530,2001 2648,1883 v1(2648,1706)
FMC_A3: U1.19 U3.26 | length 4346.4
  Top Layer w10: U1.19@905.3,1883.45 1005,1883.45 1026.5,1904.95 1026.5,2037.5 1088,2099 1088,2197 1105,2214 1123,2214 1142,2195 1142,2096.5 1070.5,2025 1070.5,1984.2 1076.7,1978 1153,1978 1172,1959 1271,1959 v1(1821,1409) ; v1(2032,1236) 2032,952 1998,918 1998,478 2034,442 2034,330 2055,309 2303,309 2542,548 2542,1073 2617.56,1148.56 U3.26@2617.56,1275
  Bottom Layer w10: v1(1821,1409) 1950,1280 1950,1264.5 1967.5,1247 2021,1247 v1(2032,1236)
FMC_A4: U1.20 U3.29 | length 3592
  Top Layer w10: U1.20@905.3,1863.76 1017.24,1863.76 v1(1018,1863) ; v1(2617.56,695) U3.29@2617.56,802.56
  Layer 1 w10: v1(504,1057) 768,793 1842.5,793 1874.5,761 1904,761 1933,790 2251,790 2316,725 2587.56,725 v1(2617.56,695)
  Bottom Layer w10: v1(504,1057) 504,1180 635,1311 746,1311 805,1370 805,1598 925,1718 925,1770 v1(1018,1863)
FMC_A5: U1.21 U3.30 | length 4420.2
  Top Layer w10: v1(677,1812) 709.4,1812 734.9,1837.5 799.42,1837.5 806,1844.08 U1.21@905.3,1844.08 ; v1(2649.05,373) U3.30@2649.05,802.56
  Layer 2 w10: v1(650,267) 650,1785 v1(677,1812)
  Bottom Layer w10: v1(650,267) 831,86 2210,86 2497,373 v1(2649.05,373)
FMC_A6: U1.60 U3.31 | length 2035.3
  Top Layer w10: v1(1275,1249.5) 1281.89,1256.39 U1.60@1281.89,1310 ; v1(2680.55,746) U3.31@2680.55,802.56
  Layer 1 w10: v1(1275,1249.5) 1275,1232.5 1256.5,1214 1233,1214 1231,1216 1204,1216 1183,1195 1183,1183 1158,1158 1158,1075 1226,1007 1498,1007 1670.5,834.5 2592.05,834.5 v1(2680.55,746)
FMC_A7: U1.63 U3.32 | length 2104.1
  Top Layer w10: U1.63@1340.95,1310 1340.95,1445 1373.95,1478 v1(1427,1478) ; U3.32@2712.05,802.56 v1(2712.05,884.83)
  Layer 2 w10: v1(2464,905) 2691.88,905 v1(2712.05,884.83)
  Bottom Layer w10: v1(1427,1478) 1427,1278.5 1502.24,1203.26 1502.24,1069.76 1592,980 1633.44,980 1687.94,1034.5 1752.5,1034.5 1772,1054 2315,1054 v1(2464,905)
FMC_A8: U1.64 U3.33 | length 1762.5
  Top Layer w10: U1.64@1360.63,1310 1360.63,1263 1377,1246.63 1377,1133 1415.5,1094.5 v1(1550.5,1094.5) ; v1(2743.54,746.92) U3.33@2743.54,802.56
  Layer 2 w10: v1(1550.5,1094.5) 1601.4,1043.6 1714.6,1034.5 2047.26,1034.5 2210.76,871 2431,871 2525,777 2713.46,777 v1(2743.54,746.92)
FMC_A9: U1.65 U3.34 | length 2159.3
  Top Layer w10: U1.65@1380.32,1310 1380.32,1353.32 v1(1387,1360) ; v1(2775.04,682) U3.34@2775.04,802.56
  Layer 2 w10: v1(1387,1360) 1387,938 1537,788 1781,788 1830,739 2112.5,739 2174.5,801 2326,801 2467.31,659.69 2752.73,659.69 v1(2775.04,682)
FMC_A10: U1.66 U3.22 | length 1732.2
  Top Layer w10: U1.66@1400,1310 1400,1178 v1(1411,1167) ; v1(2622,1030) 2743.54,1151.54 U3.22@2743.54,1275
  Layer 1 w10: v1(1411,1167) 1523,1055 1671,1055 1700,1026 1740,1026 1762,1004 2596,1004 v1(2622,1030)
FMC_A11: U1.67 U3.35 | length 2263.7
  Top Layer w10: U1.67@1419.69,1310 1419.69,1434.19 1437,1451.5 v1(1524.5,1451.5) ; v1(2806.53,722) U3.35@2806.53,802.56
  Layer 2 w10: v1(1524.5,1451.5) 1455,1382 1455,1000 1620,835 2444,835 2557,722 v1(2806.53,722)
FMC_A12: U1.106 U3.36 | length 3238.8
  Top Layer w10: v1(1861,1725.97) U1.106@1914.39,1725.97 ; v1(2787,518) 2838.03,569.03 U3.36@2838.03,802.56
  Layer 2 w10: v1(1861,1725.97) 1676.97,1725.97 1463.01,1512.01 1463.01,1470.19 1435,1442.18 1435,1401 1417.5,1383.5 1377,1383.5 1363.5,1370 1363.5,670.5 1516,518 v1(2787,518)
FMC_A16_CLE: J2.23 U1.99 U4.16 | length 1669.8
  Top Layer w10: U1.99@1914.39,1588.17 1963.33,1588.17 v1(1988,1563.5) ; U4.16@2617.6,2215 v1(2721.5,2215)
  Layer 1 w10: v1(2181,1906) 2276,2001 2300.06,2001 2514.06,2215 v1(2721.5,2215)
  Layer 2 w10: v1(1988,1563.5) 1988,1711 1930,1769 1930,2001 1937,2008 2042,2008 2144,1906 v1(2181,1906)
  Bottom Layer w10: J2.23@2130,1917.95 2169.05,1917.95 v1(2181,1906)
FMC_A17_ALE: J2.21 U1.100 U4.17 | length 2171
  Top Layer w10: v1(1864,1608) 1864.15,1607.85 U1.100@1914.39,1607.85 ; U4.17@2617.6,2195.31 2566,2195.31 2535.81,2225.5 2517.5,2225.5 2502,2210 2502,2057 2577,1982 v1(2676,1982)
  Layer 1 w10: v1(2181,1843) 2209,1871 2565,1871 v1(2676,1982)
  Bottom Layer w10: v1(1864,1608) 1889.15,1633.15 1889.15,1757.35 1884.5,1762 1801,1762 1781,1782 1781,2020 1801.79,2040.79 1883.12,2040.79 1903.91,2020 1903.91,1916.09 1970,1850 2038.57,1850 2048.04,1859.46 2090.53,1859.46 2095.04,1854.96 J2.21@2130,1854.96 2169.04,1854.96 v1(2181,1843)
FMC_A18: J2.14 U1.101 | length 218.5
  Top Layer w10: U1.101@1914.39,1627.54 v1(2011.54,1627.54)
  Bottom Layer w10: v1(2011.54,1627.54) 2018.49,1634.49 J2.14@2130,1634.49
FMC_BA0: U1.108 U3.20 | length 1770.1
  Top Layer w10: v1(1778,1529.5) 1778,1721.34 1822,1765.34 U1.108@1914.39,1765.34 ; v1(2806.53,1193) U3.20@2806.53,1275
  Layer 2 w10: v1(1778,1529.5) 1802.5,1505 1864,1505 1883.5,1485.5 1987,1485.5 1988.5,1487 1988.5,1518.5 2013.5,1543.5 2013.5,1566.2 2058.3,1611 2135.5,1611 2154.2,1592.3 2154.2,1542.3 2180,1516.5 2206.5,1516.5 2217,1527 2361,1527 2416,1472 2527.53,1472 v1(2806.53,1193)
FMC_BA1: U1.109 U3.21 | length 1462.1
  Top Layer w10: U1.109@1914.39,1785.02 1961.02,1785.02 v1(1999,1823) ; U3.21@2775.04,1275 v1(2775.04,1563)
  Layer 1 w10: v1(1999,1823) 1999,1770 2026,1743 2280,1743 2337,1686 2407,1686 2439,1654 2439,1628 2399,1588 2399,1545 2427.5,1516.5 2522,1516.5 2568.5,1563 v1(2775.04,1563)
FMC_D0: J2.45 U1.104 U3.2 U4.29 | length 3299.2
  Top Layer w10: v1(1864.41,1686.59) U1.104@1914.39,1686.59 ; v1(3373,1219.91) 3373.46,1220.38 3373.46,1232.5 ; U3.2@3373.46,1275 3373.46,1232.5 ; U4.29@3405,2136.26 3456,2136.26 3457,1596.12 3489,1564.12 3489,1283.13 3425.78,1219.91 3386.05,1219.91 3373.46,1232.5
  Layer 1 w10: v1(1864.41,1686.59) 1810.09,1686.59 1793.5,1670 1793.5,1637.72 1795,1636.22 1970.72,1636.22 1988,1653.5 1988,1689 2005,1706 2051,1706 2052,1705 2052,1679.5 2058,1673.5 2240.02,1673.5 v1(2264,1697.48)
  Bottom Layer w10: v1(2264,1697.48) J2.45@2315.04,1697.48 2592.48,1697.48 2624.5,1729.5 2680.5,1729.5 2950.99,1459.01 2950.99,1417.26 2956.25,1412 3356,1412 3373,1395 v1(3373,1219.91)
FMC_D1: J2.46 U1.105 U3.4 U4.30 | length 2939.5
  Top Layer w10: U1.105@1914.39,1706.28 1998.72,1706.28 v1(2024,1681) ; v1(3310.47,1218.13) U3.4@3310.47,1275 ; v1(3313,2156) 3313.06,2155.94 U4.30@3405,2155.94
  Layer 1 w10: v1(2024,1681) 2050.01,1654.99 2209.68,1654.99 2241.84,1622.84 2345.26,1622.84 2346.43,1624 2346.43,1632.5 2360.47,1646.54 2371.56,1646.54 2391,1665.98 2391,1653.48 v1(2403.5,1640.98)
  Layer 2 w10: v1(2403.5,1640.98) 3065.52,1640.98 3310.47,1396.03 v1(3310.47,1218.13) 3313,1220.66 v1(3313,2156)
  Bottom Layer w10: J2.46@2315.04,1665.98 2382.52,1665.98 2403.5,1645 v1(2403.5,1640.98)
FMC_D2: J2.47 U1.142 U3.5 U4.31 | length 3574.6
  Top Layer w10: U1.142@1655.91,2319.09 1655.91,2368.91 v1(1656,2369) ; U3.5@3278.98,1275 v1(3279,1332) v1(3462,1515) ; U4.31@3405,2175.63 3461.63,2175.63 v1(3462,2176)
  Layer 2 w10: v1(1656,2369) 1680.5,2393.5 1680.5,2432.5 1705.5,2457.5 1954.41,2457.5 2112.5,2299.41 2112.5,2001.39 2138.39,1975.5 2186.95,1975.5 2224.5,1937.95 2224.5,1866.52 2255.5,1835.52 2255.5,1811.97 2240,1796.47 2240,1658.56 2251.58,1646.99 v1(2264.08,1646.99) ; v1(3462,1515) v1(3462,2176)
  Bottom Layer w10: v1(2264.08,1646.99) 2276.58,1634.49 J2.47@2315.04,1634.49 2363,1634.49 2380,1617.48 2666.52,1617.48 2784,1500 2823,1500 2942,1381 3230,1381 v1(3279,1332)
FMC_D3: J2.48 U1.143 U3.7 U4.32 | length 4222.3
  Top Layer w10: U1.143@1636.22,2319.09 1636.22,2259.78 v1(1649,2247) ; v1(1876,2309) 1989.06,2309 1995.06,2315 2046,2315 2066,2295 2066,2182 2155,2093 2155,1684.5 2236.51,1602.99 2353.5,1602.99 v1(2366,1590.49) ; v1(3154,1513) 3154,2133.31 3216,2195.31 3289,2195.31 ; U3.7@3215.98,1275 3215.98,2122.3 3289,2195.31 ; U4.32@3405,2195.31 3289,2195.31
  Layer 1 w10: v1(1649,2247) 1649,2292 1666,2309 v1(1876,2309) ; v1(2366,1590.49) 2366,1533 2398.5,1500.5 2539.5,1500.5 2552,1513 v1(3154,1513)
  Bottom Layer w10: J2.48@2315.04,1602.99 2353.5,1602.99 v1(2366,1590.49)
FMC_D4: J2.49 U1.68 U3.8 U4.41 | length 4050.8
  Top Layer w10: v1(1427,1198) 1439.37,1210.37 U1.68@1439.37,1310 ; v1(2226,1028) 2288,1090 2288,1535 v1(2264.5,1558.5) ; v1(3184.49,1205.63) U3.8@3184.49,1275 v1(3184.49,1715.99) ; U4.41@3405,2372.48 v1(3497,2372.48)
  Layer 1 w10: v1(1427,1198) 1515.5,1109.5 1515.5,1085.5 1530,1071 1561.5,1071 1572.32,1081.82 1751,1081.82 1804.82,1028 v1(2226,1028)
  Bottom Layer w10: v1(2264.5,1558.5) 2277.49,1571.5 J2.49@2315.04,1571.5 2342.5,1571.5 2342.5,1566.99 2394.5,1566.99 2403.51,1576 2634,1576 2742,1468 2821.92,1468 2981.92,1308 3082.12,1308 v1(3184.49,1205.63) ; v1(3184.49,1715.99) 3497,2028.5 v1(3497,2372.48)
FMC_D5: J2.50 U1.69 U3.10 U4.42 | length 4357.3
  Top Layer w10: v1(1459,1419.5) 1459.06,1419.44 U1.69@1459.06,1310 ; v1(3121,1218) 3121.5,1218.5 U3.10@3121.5,1275 ; v1(3304,2392.16) U4.42@3405,2392.16
  Layer 1 w10: v1(1459,1419.5) 1459,1521.03 1480,1542.03 1524.53,1542.03 1888.5,1906 2022,1906 2023,1905 2023,1851 2090,1784 2228.03,1784 2240.5,1796.47 2286.03,1796.47 2287.5,1795 2287.5,1761.98 2344,1705.48 ; v1(2427.01,1552.5) 2455.51,1581 2455.51,1667.47 2417.5,1705.48 2344,1705.48 ; v1(2500,1540) 2500,1646.5 2441,1705.5 2344,1705.5 ; v1(3304,2392.16) 2675.84,1764 2362,1764 2343,1745 2343,1706.5 2344,1705.5
  Layer 2 w10: v1(2500,1540) 2766,1540 2968.5,1337.5 2968.5,1282.5 3033,1218 v1(3121,1218)
  Bottom Layer w10: J2.50@2315.04,1540 2414.51,1540 ; v1(2427.01,1552.5) 2414.51,1540 ; v1(2500,1540) 2427.01,1540 2414.51,1540
FMC_D6: J2.51 U1.70 U3.11 U4.43 | length 3768.9
  Top Layer w10: v1(1478.74,1184) U1.70@1478.74,1310 ; U3.11@3090,1275 v1(3090,1344.37) 3090,1423.49 3091.51,1425 3091.51,2038.34 v1(3090,2039.85) ; U4.43@3405,2411.85 v1(3462,2411.85)
  Layer 1 w10: v1(1478.74,1184) 1581.12,1184 1608.62,1156.5 1741.82,1156.5 1810.32,1088 2268.5,1088 2288,1107.5 2288,1255 2240.5,1302.5 v1@2240.5,1489.95 ; v1(2247.05,1496.5) 2276.5,1496.5 2484.5,1288.5 3034.13,1288.5 v1(3090,1344.37)
  Layer 2 w10: v1(3090,2039.85) v1(3462,2411.85)
  Bottom Layer w10: v1@2240.5,1489.95 v1(2247.05,1496.5) 2259.06,1508.5 J2.51@2315.04,1508.5
FMC_D7: J2.52 U1.73 U3.13 U4.44 | length 3172.3
  Top Layer w10: U1.73@1537.8,1310 1537.8,1348.83 1540.45,1351.49 1540.45,1397.45 v1(1611,1468) ; U3.13@3027.01,1275 3027.01,1461.51 v1(3042.5,1477.01) ; v1(3348,2432) 3348.47,2431.53 U4.44@3405,2431.53
  Layer 1 w10: v1(1611,1468) 1766,1468 1889.54,1591.54 2021.75,1591.54 2066.21,1636 2195.5,1636 2235.5,1596 2278.5,1596 2365.02,1509.48 2365.02,1479.17 v1(2367.18,1477.01) ; v1(2374,1477.01) v1(3042.5,1477.01)
  Bottom Layer w10: J2.52@2315.04,1477.01 v1(2367.18,1477.01) v1(2374,1477.01) ; v1(3042.5,1477.01) 3042.5,1679.5 3348,1985 v1(3348,2432)
FMC_D8: J2.53 U1.74 U3.42 | length 2936.1
  Top Layer w10: v1(1549,1151.5) 1557.48,1159.98 U1.74@1557.48,1310 ; U3.42@3027.01,802.56 v1(3027.01,998.5) v1(3027.01,1120.93)
  Layer 1 w10: v1(1549,1151.5) 1602.68,1097.82 1768.5,1097.82 1795.82,1070.5 2955.01,1070.5 v1(3027.01,998.5)
  Bottom Layer w10: J2.53@2315.04,1445.51 2818.31,1445.51 3027.01,1236.82 v1(3027.01,1120.93)
FMC_D9: J2.54 U1.75 U3.44 | length 2589
  Top Layer w10: U1.75@1577.17,1310 v1(1577.17,1364.83) ; U3.44@3090,802.56 v1(3090,908)
  Layer 2 w10: v1(1577.17,1364.83) 1557,1344.67 1557,1204.18 1663.36,1097.82 1800,1097.82 1809.82,1088 2327,1088 2415,1176 v1(2415,1414.02)
  Bottom Layer w10: J2.54@2315.04,1414.02 v1(2415,1414.02) 2547.98,1414.02 2676.03,1285.97 2676.03,1194.5 2868,1002.53 2868,932.5 2892.5,908 v1(3090,908)
FMC_D10: J2.55 U1.76 U3.45 | length 3047.5
  Top Layer w10: U1.76@1596.85,1310 1596.85,1260.15 v1(1597,1260) ; v1(3121,746) 3121.5,746.5 U3.45@3121.5,802.56
  Layer 2 w10: v1(1729,1058) 1734.7,1052.3 2053.7,1052.3 2185,921 2405,921 2499,827 3040,827 v1(3121,746)
  Bottom Layer w10: v1(1597,1260) 1729,1128 v1(1729,1058) ; J2.55@2315.04,1382.52 2467.5,1382.52 2519.92,1330.1 2519.92,1171.08 2888,803 3064,803 v1(3121,746)
FMC_D11: J2.56 U1.77 U3.47 | length 2680.7
  Top Layer w10: U1.77@1616.54,1310 v1(1616.54,1381) ; v1(3184,746.49) 3184.49,746.98 U3.47@3184.49,802.56
  Layer 2 w10: v1(1616.54,1381) 1603,1367.46 1603,1340 1573,1310 1573,1220.18 1621.18,1172 2280,1172 2378.5,1270.5 v1(2378.5,1351.02) 2378.5,1428.5 2405,1455 2444,1455 2454,1445 2454,1143 2617,980 2950.49,980 v1(3184,746.49)
  Bottom Layer w10: J2.56@2315.04,1351.02 v1(2378.5,1351.02)
FMC_D12: J2.57 U1.78 U3.48 | length 2084.3
  Top Layer w10: U1.78@1636.22,1310 1636.22,1257.78 v1(1649.5,1244.5) ; U3.48@3215.98,802.56 v1(3215.98,859.02)
  Layer 1 w10: v1(2264,1319.53) 2423.47,1319.53 2654,1089 2986,1089 v1(3215.98,859.02)
  Layer 2 w10: v1(1649.5,1244.5) 1665,1260 1704,1260 1728,1236 1763,1236 1793,1206 1966,1206 2052,1292 2132.55,1292 2192.05,1232.5 2217.05,1232.5 2264,1279.45 v1(2264,1319.53)
  Bottom Layer w10: v1(2264,1319.53) J2.57@2315.04,1319.53
FMC_D13: J2.58 U1.96 U3.50 | length 2648.3
  Top Layer w10: v1(1864,1529) 1864.11,1529.11 U1.96@1914.39,1529.11 ; U3.50@3278.98,802.56 v1(3279,884)
  Layer 1 w10: v1(1864,1529) 1874.5,1539.5 2012,1539.5 2013.5,1541 2013.5,1561.5 2027.54,1575.54 2034.54,1575.54 2056.77,1597.77 2101.23,1597.77 2135.01,1563.99 2216,1563.99 2217,1562.99 2217,1513 ; v1(2217,1297.53) 2217,1513 ; v1(3279,884) 3334,939 3334,1251 3366,1283 3366,1370 3313.73,1422.27 2956,1422.27 2939.08,1439.19 2356.81,1439.19 2270,1526 2230,1526 2217,1513
  Bottom Layer w10: v1(2217,1297.53) 2226.5,1288.03 J2.58@2315.04,1288.03
FMC_D14: J2.59 U1.97 U3.51 | length 2657.1
  Top Layer w10: U1.97@1914.39,1548.8 1968.7,1548.8 1978,1539.5 2027.5,1539.5 v1(2037,1549) ; v1(3310,727.47) 3310.47,727.94 U3.51@3310.47,802.56
  Layer 2 w10: v1(2037,1549) 2037,1564.5 2067.5,1595 2117.5,1595 2135,1577.5 2135,1327.54 v1(2206,1256.54)
  Bottom Layer w10: v1(2206,1256.54) 2242.5,1256.54 ; J2.59@2315.04,1256.54 2242.5,1256.54 ; v1(3310,727.47) 3352.53,770 3396.53,770 3397,769.53 3397,676.35 3362.65,642 2622,642 2532,732 2532,1062.38 2416.38,1178 2254,1178 2237,1195 2237,1251.04 2242.5,1256.54
FMC_D15: J2.60 U1.98 U3.53 | length 3039.3
  Top Layer w10: v1(1829.52,1568) 1830,1568.48 U1.98@1914.39,1568.48 ; v1(3373.46,737) U3.53@3373.46,802.56
  Layer 1 w10: v1(1829.52,1568) 1675.76,1568 1531,1423.24 1502.74,1423.24 1474.5,1395 1474.5,1339.5 1625.5,1188.5 2224,1188.5 v1(2260.54,1225.04)
  Bottom Layer w10: v1(2260.54,1225.04) J2.60@2315.04,1225.04 2425.96,1225.04 2560,1091 2560,814 2716,658 3294.46,658 v1(3373.46,737)
FMC_NBL0: J2.43 U1.169 U3.15 | length 3178.5
  Top Layer w10: v1(1124,2269) 1124.41,2269.41 U1.169@1124.41,2319.09 ; U3.15@2964.01,1275 2964.01,1431.01 v1(2979,1446)
  Layer 2 w10: v1(1124,2269) 1120.6,2272.4 1120.6,2391.1 1122,2392.5 1162.5,2392.5 1197.5,2357.5 1319.5,2357.5 1378,2416 1509,2416 1567.5,2474.5 1984.21,2474.5 2133,2325.71 2133,2012.89 2154.39,1991.5 2219,1991.5 2240.5,1970 2240.5,1879.5 2276.5,1843.5 2276.5,1785.47 v1(2264,1772.97)
  Bottom Layer w10: v1(2264,1772.97) 2276.5,1760.47 J2.43@2315.04,1760.47 2556.47,1760.47 2593,1797 2736,1797 2749,1784 2904,1784 2979,1709 v1(2979,1446)
FMC_NBL1: J2.44 U1.170 U3.39 | length 4909.1
  Top Layer w10: U1.170@1104.73,2319.09 1104.73,2433.23 v1(1122,2450.5) ; v1(2932.52,746) U3.39@2932.52,802.56
  Layer 1 w10: v1(2367,1729) 2367.5,1729.5 2672,1729.5 2696.5,1705 3144,1705 3397,1452 3397,1178.55 3381.78,1163.33 3381.78,865.78 3234,718 2960.52,718 v1(2932.52,746)
  Layer 2 w10: v1(1122,2450.5) 1155,2450.5 1234.58,2530.08 1289.08,2530.08 1424,2665 2342.5,2665 2355.82,2651.68 2355.82,2144.82 2342,2131 2342,1891.45 2355,1878.45 2420.55,1878.45 2452.5,1846.5 2452.5,1770 2451,1768.5 2406.5,1768.5 v1(2367,1729)
  Bottom Layer w10: J2.44@2315.04,1728.98 v1(2367,1729)
FMC_NCE3: R17.2 U1.152 U4.9 | length 7671
  Top Layer w10: U1.152@1459.06,2319.09 v1(1459.06,2387) ; v1(2531.46,2352.79) U4.9@2617.6,2352.79
  Layer 1 w10: v1(1459.06,2387) 1617.5,2387 1633,2402.5 1633,2451.5 1671.5,2490 2394.25,2490 v1(2531.46,2352.79)
  Layer 2 w10: v1(450,1436) 421.5,1407.5 421.5,1032.5 407.5,1018.5 353.5,1018.5 47,1325 47,3357.5 59.5,3370 1088,3370 1263,3195 2233,3195 2550,2878 2550,2371.33 v1(2531.46,2352.79)
  Bottom Layer w10: v1(450,1436) 425,1411 425,1355 R17.2@450.06,1355
FMC_NE1: J1.35 U1.151 | length 453.8
  Top Layer w10: v1(1478.74,2014.02) U1.151@1478.74,2319.09
  Bottom Layer w10: J1.35@1330,2014.02 v1(1478.74,2014.02)
FMC_NOE: J2.26 U1.146 U4.8 | length 2344.5
  Top Layer w10: U1.146@1577.17,2319.09 1577.17,2437.67 v1(1590,2450.5) ; U4.8@2617.6,2372.48 v1(2709,2372.48)
  Layer 1 w10: v1(1590,2450.5) 1691,2551.5 2230.5,2551.5 2260,2522 2456,2522 2605.52,2372.48 v1(2709,2372.48)
  Bottom Layer w10: v1(1590,2450.5) 1581,2441.5 1581,2341.5 1598,2324.5 1683.5,2324.5 1722,2286 1722,2155.5 1742.5,2135 1855,2135 1968.5,2021.5 2000.07,2021.5 2017.5,2004.07 2066.07,2004.07 2074.44,2012.44 J2.26@2130,2012.44
FMC_NWAIT: J2.27 U1.150 U4.7 | length 2115.1
  Top Layer w10: U1.150@1498.43,2319.09 1498.43,2544.43 v1(1500,2546) ; v1(2526,2518) 2526,2407.5 2541.34,2392.16 U4.7@2617.6,2392.16
  Layer 1 w10: v1(1500,2546) 1521.5,2567.5 v1@2273.5,2567.5 ; v1(2278,2563) v1@2273.5,2567.5 ; v1(2526,2518) 2476.5,2567.5 v1@2273.5,2567.5
  Layer 2 w10: v1(2193,2043.94) 2220,2070.94 2220,2137 2278,2195 v1(2278,2563)
  Bottom Layer w10: J2.27@2130,2043.94 v1(2193,2043.94)
FMC_NWE: J2.22 U1.147 U4.18 | length 2522.1
  Top Layer w10: U1.147@1557.48,2319.09 1557.48,2182.52 v1(1561,2179) ; U4.18@2617.6,2175.63 v1(2674.47,2175.63) v1(2716.63,2175.63)
  Layer 1 w10: v1(1561,2179) 1561,2270.5 1623,2332.5 1899.5,2332.5 1921,2311 1957,2311 2061,2415 2330,2415 2470,2275 2717.5,2275 2745,2247.5 2745,2204 v1(2716.63,2175.63) ; v1(2079,1886) 2089.54,1875.46 2185.42,1875.46 2258.95,1949 2447.84,1949 v1(2674.47,2175.63)
  Bottom Layer w10: v1(2079,1886) 2079.46,1886.46 J2.22@2130,1886.46
FMC_SDCKE0: U1.35 U3.37 | length 3179.7
  Top Layer w10: v1(612,1437) 743.48,1568.48 U1.35@905.3,1568.48 ; v1(2869.53,716) U3.37@2869.53,802.56
  Layer 1 w10: v1(612,1437) 689,1360 689,1129 859,959 1481,959 1625,815 2545,815 2709,651 2804.53,651 v1(2869.53,716)
FMC_SDCLK: U1.112 U3.38 | length 2531.6
  Top Layer w10: v1(1864,1844) 1864.08,1844.08 U1.112@1914.39,1844.08 ; U3.38@2901.02,802.56 v1(2901,951)
  Layer 2 w10: v1(1864,1844) 1888,1820 1888,1664 1867.51,1663 1632.51,1428 1601,1428 1494,1321 1494,1241 1653.18,1081.82 1746.28,1081.82 1759.8,1068.3 2076.7,1068.3 2194,951 v1(2901,951)
FMC_SDNCAS: U1.160 U3.17 | length 8954
  Top Layer w10: U1.160@1301.58,2319.09 1301.58,2355.33 1309.5,2363.25 v1(1309.5,2849.5) ; v1(2898,1332) 2901.02,1328.98 U3.17@2901.02,1275
  Bottom Layer w10: v1(1309.5,2849.5) 1528,3068 1528,3380.5 1492.5,3416 1342.5,3416 1329,3402.5 1329,3144 1076,2891 1076,2515.5 1066.5,2506 1066.5,2357.5 1054,2345 1014.5,2345 1002,2357.5 1002,2503 1028,2529 1028,3439.5 1042.5,3454 2697,3454 3521.5,2629.5 3521.5,1095.5 3506.95,1080.95 2993.05,1080.95 2898,1176 v1(2898,1332)
FMC_SDNE0: R19.2 U1.34 U3.19 | length 6281.8
  Top Layer w10: U1.34@905.3,1588.17 954.83,1588.17 v1(955,1588) ; v1(1125,847.87) 1125.06,847.81 R19.2@1125.06,800 ; U3.19@2838.03,1275 v1(2838.03,1348)
  Layer 2 w10: v1(955,1588) 909,1542 909,1315 ; v1(1125,847.87) 1125,595 1105,575 1040,575 1029,586 1029,1143 971,1201 955,1201 ; v1(2838.03,1348) 2838.03,1341.47 2985.5,1194 3137,1194 3248,1083 3248,737 2857,346 2367,346 2316.5,295.5 1174,295.5 1169.5,300 923,300 800,423 800,882.5 813,895.5 833.5,895.5 878,851 878,845 890.5,832.5 929.5,832.5 942,845 942,881.73 845,978.73 845,1032.5 967.5,1155 967.5,1188.5 955,1201 ; 909,1315 909,1313 913,1309 ; 909,1315 913,1311 913,1309 ; 913,1309 913,1218 930,1201 955,1201
FMC_SDNRAS: U1.59 U3.18 | length 2827.7
  Top Layer w10: v1(1230,1389) 1262.21,1356.79 U1.59@1262.21,1310 ; v1(2774,1022) 2869.53,1117.53 U3.18@2869.53,1275
  Layer 1 w10: v1(1128,1080) 1082,1126 1082,1208 1147,1273 1361.5,1273 1377,1257.5 1377,1141.42 1479.42,1039 1535,1039 1599,975 2727,975 v1(2774,1022)
  Layer 2 w10: v1(1128,1080) 1190,1142 1190,1374 1205,1389 v1(1230,1389)
FMC_SDNWE: U1.32 U3.16 | length 4740.8
  Top Layer w10: U1.32@905.3,1627.54 977.54,1627.54 v1(990,1640) ; v1(2932.52,1184.48) U3.16@2932.52,1275
  Layer 1 w10: v1(1056,626) 1924,626 2134,416 2134,310 2135,309 2225,309 2226,310 2226,652 2261,687 2360,687 2430,617 2845,617 2909,681 2909,757.5 2921.5,770 3165,770 3240,845 3240,1132.5 3227.5,1145 2972,1145 v1(2932.52,1184.48)
  Layer 2 w10: v1(990,1640) 990,1567 1022,1535 1022,1421 1056,1387 v1(1056,626)
GBC_KEY: J1.15 U1.13 | length 876.9
  Top Layer w10: v1(769,1862) 817.5,1862 832,1876.5 832,1998.56 835,2001.56 U1.13@905.3,2001.56
  Layer 1 w10: v1(769,1862) 824,1807 1117.5,1807 1140,1784.5 1140,1711.5 v1(1196,1655.5)
  Bottom Layer w10: J1.15@1144.96,1667.56 1183.94,1667.56 v1(1196,1655.5)
GBC_LED: J1.45 U1.50 | length 605.5
  Top Layer w10: U1.50@1085.04,1310 1085.04,1363.96 1065,1384 1065,1539 1129,1603 1129,1666 1142.5,1679.5 1206.44,1679.5 v1(1226,1699.06)
  Bottom Layer w10: v1(1226,1699.06) J1.45@1330,1699.06